# EAGLE board untitled (EAGLE 9.3.0)
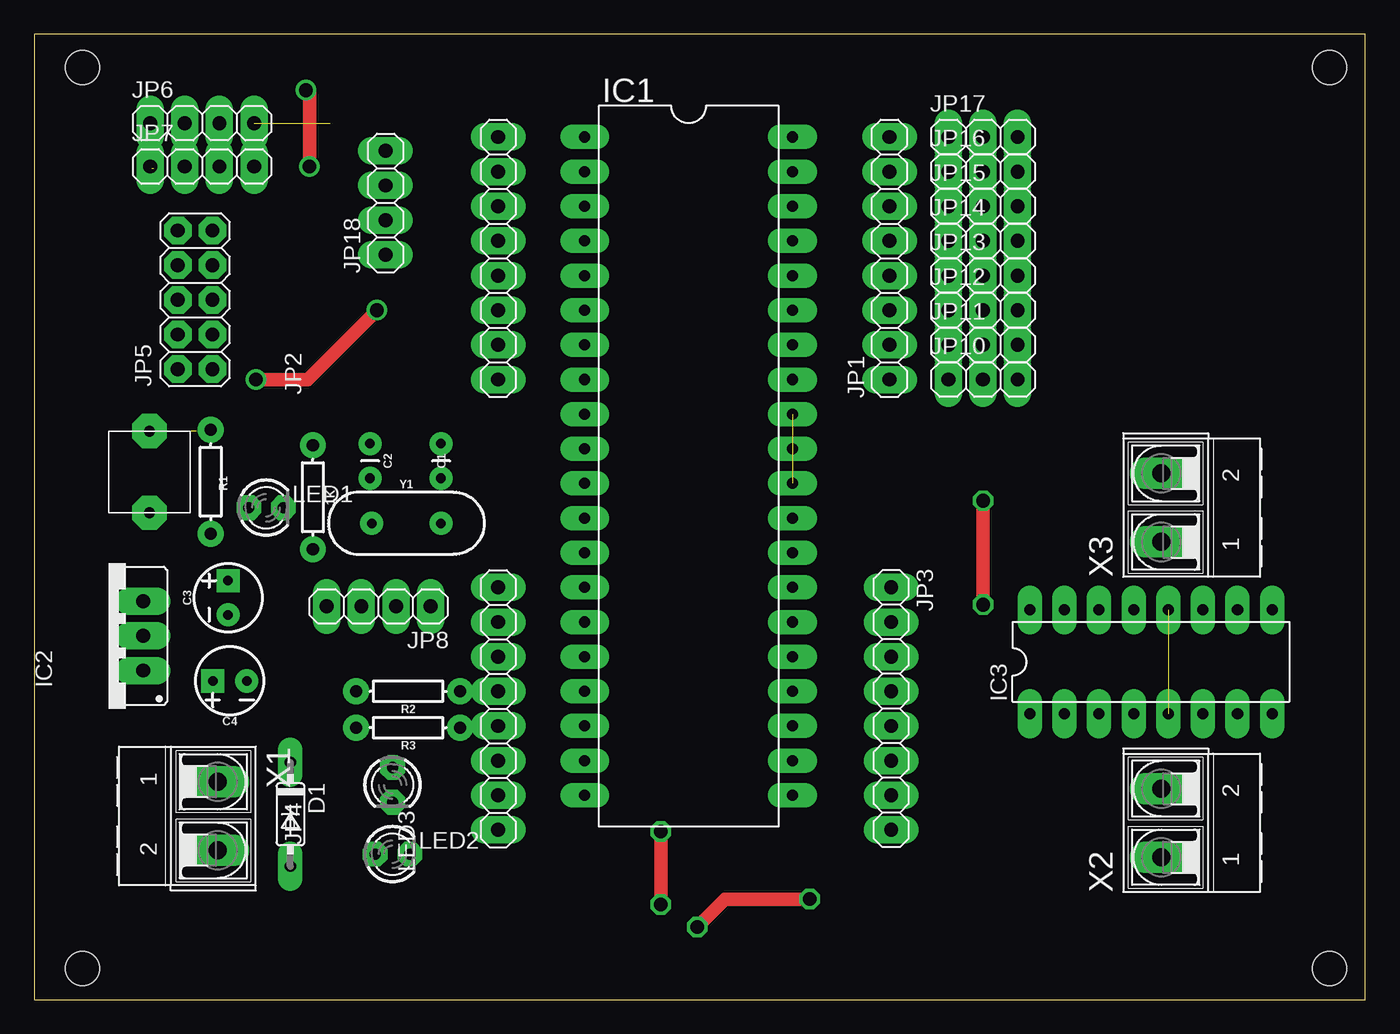
[diagram p0: board, top side]
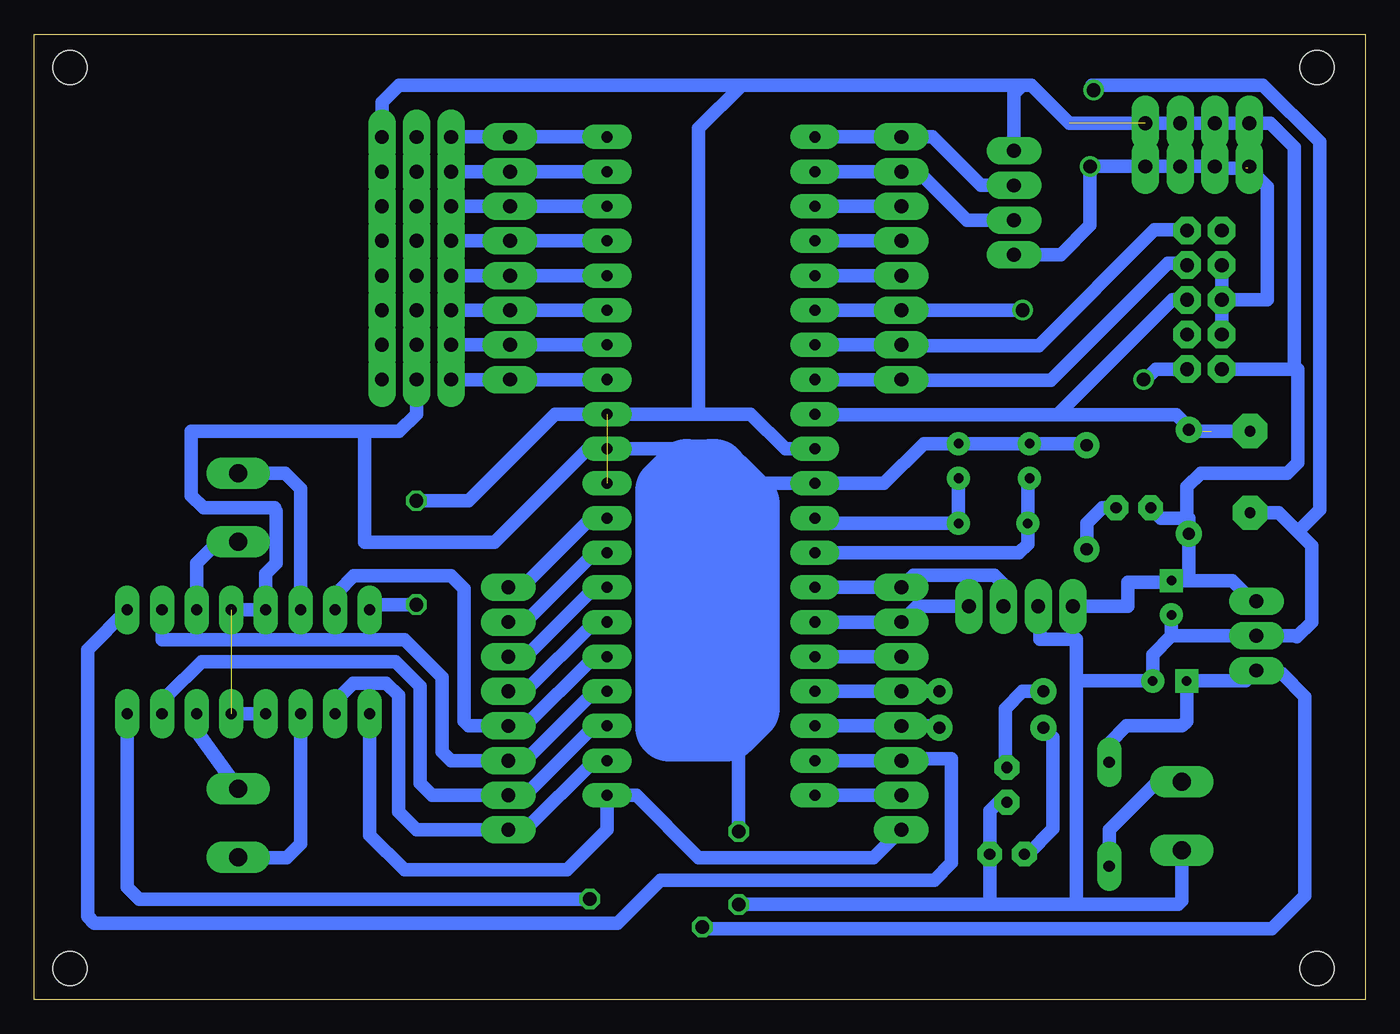
[diagram p1: board, bottom side, seen from below]

Size 97.64 x 70.79 mm. Coordinates in mm from the lower left corner, seen from the top.
Outline: 0,0 97.64,0 97.64,70.79 0,70.79 0,0
Copper layers (1*16): Top 0.035mm / dielectric 1.5mm / Bottom 0.035mm
Design rules "default *": minimum track width 1mm, minimum drill 0.35mm, track to track 0.6mm, track to pad 0.8mm, pad to pad 6mil, via to via 6mil, smd to smd 6mil, copper to edge 40mil, drill to drill 6mil, minimum pad ring 0.5mm, minimum via ring 8mil, stop-mask expansion 4mil, vias tented up to drill 0mil, thermal gap 10mil
Holes 2.5 mm at 3.56,68.33 3.56,2.29 95,2.29 95,68.33

## Footprints (pad centres in the part's own frame; a part is rotated, then mirrored left to right if it is on the bottom)
AXIAL-0.3 = drill 0.9 pad 1.88: P$1 -3.81,0; P$2 3.81,0
CAP-PTH-2.54 = drill 0.7 pad 1.651: 1 -1.27,0; 2 1.27,0
CPOL-RADIAL-2.5MM-5MM = drill 0.7 pad 1.651 square: 1 1.25,0 | drill 0.7 pad 1.651: 2 -1.25,0
DO35-7 = drill 0.813 long: A 3.81,0; C -3.81,0
DIL40 = drill 0.813 long: 1 -24.13,-7.62; 2 -21.59,-7.62; 3 -19.05,-7.62; 4 -16.51,-7.62; 5 -13.97,-7.62; 6 -11.43,-7.62; 7 -8.89,-7.62; 8 -6.35,-7.62; 9 -3.81,-7.62; 10 -1.27,-7.62; 11 1.27,-7.62; 12 3.81,-7.62; 13 6.35,-7.62; 14 8.89,-7.62; 15 11.43,-7.62; 16 13.97,-7.62; 17 16.51,-7.62; 18 19.05,-7.62; 19 21.59,-7.62; 20 24.13,-7.62; 21 24.13,7.62; 22 21.59,7.62; 23 19.05,7.62; 24 16.51,7.62; 25 13.97,7.62; 26 11.43,7.62; 27 8.89,7.62; 28 6.35,7.62; 29 3.81,7.62; 30 1.27,7.62; 31 -1.27,7.62; 32 -3.81,7.62; 33 -6.35,7.62; 34 -8.89,7.62; 35 -11.43,7.62; 36 -13.97,7.62; 37 -16.51,7.62; 38 -19.05,7.62; 39 -21.59,7.62; 40 -24.13,7.62
78XXS = drill 1.016 long: GND 0,-2.54; IN -2.54,-2.54; OUT 2.54,-2.54
DIL16 = drill 0.813 long: 1 -8.89,-3.81; 2 -6.35,-3.81; 3 -3.81,-3.81; 4 -1.27,-3.81; 5 1.27,-3.81; 6 3.81,-3.81; 7 6.35,-3.81; 8 8.89,-3.81; 9 8.89,3.81; 10 6.35,3.81; 11 3.81,3.81; 12 1.27,3.81; 13 -1.27,3.81; 14 -3.81,3.81; 15 -6.35,3.81; 16 -8.89,3.81
1X08 = drill 1.016 long: 1 -8.89,0; 2 -6.35,0; 3 -3.81,0; 4 -1.27,0; 5 1.27,0; 6 3.81,0; 7 6.35,0; 8 8.89,0
2X05 = drill 1.016 octagon: 1 -5.08,-1.27; 2 -5.08,1.27; 3 -2.54,-1.27; 4 -2.54,1.27; 5 0,-1.27; 6 0,1.27; 7 2.54,-1.27; 8 2.54,1.27; 9 5.08,-1.27; 10 5.08,1.27
1X04 = drill 1.016 long: 1 -3.81,0; 2 -1.27,0; 3 1.27,0; 4 3.81,0
1X03 = drill 1.016 long: 1 -2.54,0; 2 0,0; 3 2.54,0
LED3MM = drill 0.813 octagon: A -1.27,0; K 1.27,0
PUSHBUTTON-AE = drill 0.8 pad 2.5 octagon: P$1 -3,0; P$2 -3,-6
AK500/2-H = drill 1.321 long: 1 -2.515,0; 2 2.515,0
HC49US = drill 0.7 pad 1.651: 1 -2.54,0; 2 2.54,0

## Placement (x,y rotation side)
1K  10M  [AXIAL-0.3]  20.45,36.83 270 top
C1  22pF  [CAP-PTH-2.54]  29.85,39.5 270 top
C2  22pF  [CAP-PTH-2.54]  24.64,39.5 270 top
C3  10uF  [CPOL-RADIAL-2.5MM-5MM]  14.22,29.46 90 top
C4  10uF  [CPOL-RADIAL-2.5MM-5MM]  14.35,23.37 180 top
D1  1N4148DO35-7  [DO35-7]  18.8,13.59 270 top
IC1  MEGA16-P  [DIL40]  48.01,39.12 270 top
IC2  [78XXS]  5.46,26.67 90 top
IC3  L293D  [DIL16]  81.92,24.77 0 top
JP1  [1X08]  62.74,54.36 90 top
JP2  [1X08]  34.04,54.36 90 top
JP3  [1X08]  62.87,21.34 270 top
JP4  [1X08]  34.04,21.34 90 top
JP5  [2X05]  11.81,51.31 90 top
JP6  [1X04]  12.32,64.26 0 top
JP7  [1X04]  12.32,61.09 0 top
JP8  [1X04]  25.27,28.83 180 top
JP10  [1X03]  69.6,45.47 0 top
JP11  [1X03]  69.6,48.01 0 top
JP12  [1X03]  69.6,50.55 0 top
JP13  [1X03]  69.6,53.09 0 top
JP14  [1X03]  69.6,55.63 0 top
JP15  [1X03]  69.6,58.17 0 top
JP16  [1X03]  69.6,60.71 0 top
JP17  [1X03]  69.6,63.25 0 top
JP18  [1X04]  25.78,58.42 90 top
LED1  [LED3MM]  17.02,36.07 0 top
LED2  [LED3MM]  26.29,10.67 0 top
LED3  [LED3MM]  26.29,15.75 270 top
R1  10k  [AXIAL-0.3]  12.95,37.97 270 top
R2  10M  [AXIAL-0.3]  27.43,22.61 180 top
R3  10M  [AXIAL-0.3]  27.43,19.94 180 top
U$1  PUSHBUTTON-AE  [PUSHBUTTON-AE]  5.46,35.69 180 top
X1  [AK500/2-H]  13.46,13.46 270 top
X2  [AK500/2-H]  82.68,12.95 90 top
X3  [AK500/2-H]  82.68,36.07 90 top
Y1  16MHz  [HC49US]  27.31,34.93 0 top

## Library data of the parts
1K R1-R3 = SparkFun-Resistors; PROD_ID: RES-09327
C1 C2 = SparkFun-Capacitors; PROD_ID: CAP-09128
C3 C4 = SparkFun-Capacitors; PROD_ID: CAP-08440
D1 = diode
IC1 = atmel; MPN: ATMEGA16-16PU; OC_FARNELL: 9171142; OC_NEWARK: 01M6885
IC2 = v-reg
IC3 = st-microelectronics; MPN: L293D; OC_FARNELL: 9589619; OC_NEWARK: 56P8249
JP1-JP8 JP10-JP18 = pinhead
LED1-LED3 = led
U$1 = PushButton-AE
X1-X3 = con-ptr500; OC_FARNELL: unknown; OC_NEWARK: unknown
Y1 = SparkFun-Clocks; PROD_ID: XTAL-08181; SF_ID: COM-00536

## Nets
5V: C3.1 IC1.10 IC1.30 IC1.32 IC2.OUT IC3.16 JP5.2 JP6.1 JP6.2 JP6.3 JP6.4 JP8.4 JP10.3 JP11.3 JP12.3 JP13.3 JP14.3 JP15.3 JP16.3 JP17.3 JP18.4 LED1.A R1.P$2
BATTERY: C4.1 D1.C IC2.IN IC3.8
ENA: IC1.21 IC3.1 JP4.1
ENB: IC1.19 IC3.9 JP4.3
GND: 1K.P$1 C1.1 C2.1 C3.2 C4.2 IC1.11 IC1.31 IC2.GND IC3.4 IC3.5 IC3.12 IC3.13 JP5.4 JP5.6 JP5.8 JP7.1 JP7.2 JP7.3 JP7.4 JP8.3 JP10.2 JP11.2 JP12.2 JP13.2 JP14.2 JP15.2 JP16.2 JP17.2 JP18.1 LED2.K LED3.K U$1.P$1 X1.2
IN1: IC1.22 IC3.2 JP3.8
IN2: IC1.23 IC3.7 JP3.7
IN3: IC1.24 IC3.10 JP3.6
IN4: IC1.25 IC3.15 JP3.5
MISO: IC1.7 JP2.2 JP5.9
MOSI: IC1.6 JP2.3 JP5.1
N$1: C1.2 IC1.12 Y1.2
N$2: C2.2 IC1.13 Y1.1
N$3: LED2.A R3.P$2
N$4: 1K.P$2 LED1.K
N$5: LED3.A R2.P$2
N$6: D1.A X1.1
N$7: IC1.33 JP1.1 JP10.1
N$8: IC1.34 JP1.2 JP11.1
N$9: IC1.35 JP1.3 JP12.1
N$10: IC1.36 JP1.4 JP13.1
N$11: IC1.37 JP1.5 JP14.1
N$12: IC1.38 JP1.6 JP15.1
N$13: IC1.39 JP1.7 JP16.1
N$14: IC1.40 JP1.8 JP17.1
N$18: IC1.5 JP2.4
N$19: IC1.4 JP2.5
N$20: IC1.3 JP2.6
N$21: IC1.2 JP2.7 JP18.2
N$22: IC1.1 JP2.8 JP18.3
N$23: IC1.29 JP3.1
N$24: IC1.28 JP3.2
N$25: IC1.27 JP3.3
N$32: IC1.20 JP4.2
N$34: IC1.18 JP4.4 R3.P$1
N$35: IC1.17 JP4.5 R2.P$1
N$36: IC1.16 JP4.6
OUT1: IC3.3 X2.1
OUT2: IC3.6 X2.2
OUT3: IC3.11 X3.1
OUT4: IC3.14 X3.2
PC4: IC1.26 JP3.4
RESET: IC1.9 JP5.5 R1.P$1 U$1.P$2
RX: IC1.14 JP4.8 JP8.2
SCK: IC1.8 JP2.1 JP5.7
TX: IC1.15 JP4.7 JP8.1

## Tracks (layer width: path | path; a pad name or v marks a point on that pad's centre or on a via)
5V  (via drill 1)  (2 unrouted)
  Top 1: v69.6,28.96 v69.6,36.58
  Bottom 1: IC2.OUT 8.25,29.21 9.76,30.71 C3.1 | C3.1 12.95,30.71 R1.P$2 12.95,35.31 13.08,35.31 | 13.08,35.31 13.08,37.59 12.07,38.61 5.71,38.61 4.95,39.37 4.95,46.23 5.21,46.23 | 48.9,42.93 IC1.32 59.44,42.93 65.79,36.58 v69.6,36.58 | IC1.10 42.55,40.39 45.09,42.93 48.9,42.93 | 48.9,42.93 48.9,63.88 45.72,67.06 | JP5.2 5.21,46.23 | 5.21,46.23 5.21,62.48 6.99,64.26 JP6.1 JP6.2 JP6.3 21.72,64.26 24.51,67.06 25.15,67.06 | 45.72,67.06 25.15,67.06 | IC3.16 72.64,28.96 v69.6,28.96 | 21.46,29.08 JP8.4 17.42,28.83 17.42,30.59 14.35,30.59 C3.1 | LED1.A 14.99,35.31 13.08,35.31 | JP10.3 JP11.3 JP12.3 JP13.3 JP14.3 JP15.3 JP16.3 JP17.3 72.14,65.79 70.87,67.06 45.72,67.06 | JP18.4 25.78,66.42 25.15,67.06
BATTERY  (via drill 1)
  Top 1: v48.64,5.33 50.67,7.37 v56.9,7.37
  Bottom 1: IC3.8 90.81,8.26 89.92,7.37 v56.9,7.37 | D1.C 18.8,18.8 17.53,20.07 13.46,20.07 13.1,20.43 C4.1 8.76,23.37 IC2.IN 7.75,23.88 6.1,23.88 4.45,22.23 4.45,7.62 6.86,5.21 48.51,5.21 v48.64,5.33
ENA
  Bottom 1: IC3.1 73.03,12.06 70.48,9.53 58.55,9.53 55.63,12.45 IC1.21 53.47,14.99 48.9,10.41 36.07,10.41 JP4.1
ENB
  Bottom 1: IC1.19 JP4.3 33.91,17.65 30.35,17.65 30.35,10.03 31.62,8.76 51.69,8.76 54.86,5.59 93.22,5.59 93.73,6.1 93.73,25.65 IC3.9
GND  (via drill 1)  (2 unrouted)
  Top 1: v45.97,12.32 45.97,12.19 45.85,12.06 45.97,11.94 v45.97,6.99 | v19.94,66.67 20.19,66.42 v20.19,61.09
  Bottom 1: 14.22,26.67 C3.2 | 14.22,26.67 IC2.GND 5.08,26.67 5.02,26.61 3.94,27.69 3.94,33.27 4.96,34.3 | U$1.P$1 6.35,35.69 4.96,34.3 | IC1.11 47.05,37.85 | IC1.11 46.99,37.85 | 47.75,38.61 49.53,40.39 IC1.31 57.02,40.39 63.88,33.53 73.41,33.53 73.41,41.66 | JP5.4 JP5.6 | JP5.6 10.16,51.31 | 8.64,60.96 JP7.1 8.51,60.93 7.19,59.61 7.19,51.31 JP5.6 | 8.76,60.96 11.18,60.96 JP7.2 JP7.3 JP7.4 v20.19,61.09 20.19,56.77 22.35,54.61 JP18.1 | JP5.8 JP5.6 | 4.96,34.3 3.35,35.91 3.35,62.89 7.52,67.06 20.07,67.06 20.07,66.8 v19.94,66.67 | 21.21,6.99 13.72,6.99 13.46,7.24 X1.2 | 14.22,26.67 15.6,25.29 C4.2 21.21,23.37 | IC3.5 IC3.4 | IC3.12 IC3.13 80.65,31.24 79.88,32 79.88,35.81 80.01,35.94 80.01,36.07 85.22,36.07 86.11,36.96 86.11,41.66 73.41,41.66 | IC1.11 35.31,37.85 32.39,40.77 C1.1 C2.1 20.57,40.77 1K.P$1 | 46.61,20.19 45.97,20.83 | JP8.3 23.88,28.7 23.88,26.42 21.21,26.42 21.21,23.37 | JP17.2 JP16.2 JP15.2 JP14.2 JP13.2 JP12.2 JP11.2 JP10.2 69.6,42.93 70.87,41.66 73.41,41.66 | 21.21,23.37 21.21,6.99 | v45.97,12.32 45.97,20.83 | 45.97,20.83 45.47,21.34 | 21.21,6.99 27.69,6.99 | 27.69,6.99 v45.97,6.99 | 27.69,6.99 27.56,7.11 LED2.K 27.56,13.84 26.92,14.48 LED3.K
  Bottom 5: 46.99,37.85 45.47,36.32 45.47,21.34 46.86,19.94 51.05,19.94 51.05,37.34 49.78,38.61 48.01,38.61 | 48.01,38.61 47.75,38.61 | 48.01,38.61 49.28,37.34 49.28,22.61 48.01,22.61
IN1
  Bottom 1: IC1.22 56.54,17.53 61.62,12.45 JP3.8 69.6,12.45 70.92,13.77 70.92,22.3 71.81,23.19 74.24,23.19 75.39,22.05 75.39,21.14 IC3.2
IN2
  Bottom 1: IC1.23 56.54,20.07 61.62,14.99 JP3.7 68.45,14.99 69.32,15.85 69.32,22.96 71.14,24.79 85.34,24.79 87.83,22.3 87.83,21.39 IC3.7
IN3
  Bottom 1: IC1.24 55.7,22.68 56.46,22.68 61.67,17.48 62.28,17.48 62.33,17.53 JP3.6 67.06,17.53 67.72,18.19 67.72,23.62 70.48,26.39 88.27,26.39 IC3.10
IN4
  Bottom 1: IC1.25 55.81,24.97 56.72,24.97 61.62,20.07 JP3.5 65.79,20.07 66.12,20.4 66.12,30.13 67.05,31.06 74.2,31.06 75.34,29.92 75.34,28.8 IC3.15
MISO
  Bottom 1: IC1.7 JP2.2 33.99,47.96 23.95,47.96 15.47,56.44 13.13,56.44 JP5.9
MOSI  (via drill 1)
  Top 1: v16.26,45.47 20.07,45.47 v25.15,50.55
  Bottom 1: IC1.6 JP2.3 | JP2.3 33.7,50.88 | 33.91,50.67 JP2.3 | JP5.1 15.37,46.23 16.13,45.47 v16.26,45.47 | v25.15,50.55 JP2.3
N$1
  Bottom 1: C1.2 Y1.2 40.01,34.93 IC1.12 40.51,35.43
N$2
  Bottom 1: 40.13,33.02 IC1.13 25.4,32.77 24.76,33.4 Y1.1 24.76,38.1 C2.2
N$3
  Bottom 1: LED2.A 24.76,10.67 22.91,12.52 22.91,19.23 R3.P$2
N$4
  Bottom 1: LED1.K 19.3,36.07 20.45,34.93 1K.P$2
N$5
  Bottom 1: R2.P$2 25.15,22.61 26.42,21.34 26.42,17.15 LED3.A
N$6
  Bottom 1: D1.A 18.8,12.45 15.26,15.98 X1.1
N$7
  Bottom 1: IC1.33 JP1.1 JP10.1
N$8
  Bottom 1: IC1.34 JP1.2 JP11.1
N$9
  Bottom 1: IC1.35 JP1.3 JP12.1
N$10
  Bottom 1: IC1.36 JP1.4 JP13.1
N$11
  Bottom 1: IC1.37 JP1.5 JP14.1
N$12
  Bottom 1: IC1.38 JP1.6 JP15.1
N$13
  Bottom 1: IC1.39 JP1.7 JP16.1
N$14
  Bottom 1: IC1.40 JP1.8 JP17.1
N$18
  Bottom 1: JP2.4 IC1.5
N$19
  Bottom 1: IC1.4 JP2.5
N$20
  Bottom 1: IC1.3 JP2.6 33.78,57.91
N$21
  Bottom 1: IC1.2 JP2.7 32.77,60.71 29.21,57.15 JP18.2
N$22
  Bottom 1: IC1.1 JP2.8 31.75,63.25 28.19,59.69 JP18.3
N$23
  Bottom 1: JP3.1 61.85,30.23 56.64,35.43 55.75,35.43 IC1.29
N$24
  Bottom 1: IC1.28 55.7,32.84 56.46,32.84 61.62,27.69 JP3.2
N$25
  Bottom 1: JP3.3 62.53,25.48 61.28,25.48 56.59,30.17 55.63,30.17 IC1.27
N$32
  Bottom 1: JP4.2 IC1.20
N$34
  Bottom 1: IC1.18 JP4.4 31.37,20.07 R3.P$1
N$35
  Bottom 1: IC1.17 JP4.5 R2.P$1
N$36
  Bottom 1: IC1.16 JP4.6
OUT1
  Bottom 1: IC3.3 78.11,11.43 79.12,10.41 82.65,10.41 X2.1
OUT2
  Bottom 1: IC3.6 85.73,19.7 X2.2
OUT3
  Bottom 1: IC3.11 85.73,32 84.07,33.66 82.78,33.66 X3.1
OUT4
  Bottom 1: IC3.14 78.11,37.47 79.22,38.58 X3.2
PC4
  Bottom 1: IC1.26 55.68,27.63 56.59,27.63 61.62,22.61 JP3.4
RESET  (1 unrouted)
  Bottom 1: IC1.9 40.35,42.89 22.48,42.89 | 22.48,42.89 13.88,42.89 12.95,41.97 R1.P$1 12.86,41.69 11.3,41.69 | U$1.P$2 11.94,41.69 | 22.48,42.89 22.48,42.98 14.15,51.31 JP5.5
RX
  Bottom 1: IC1.14 JP4.8 33.15,31.12 27.21,31.12 26.54,30.45 JP8.2
SCK
  Bottom 1: IC1.8 JP2.1 33.99,45.42 23.07,45.42 14.51,53.98 13.21,53.98 JP5.7
TX
  Bottom 1: IC1.15 JP4.7 32.89,28.83 JP8.1